# Altium PCB Base_Station_Unit_board.PcbDoc
Units mm, origin at the board's own origin, x right, y up, seen from the top; angles counter-clockwise.
Board outline 75 x 70 mm, 4 copper layers (Component Side Top, Ground Plane, Power Plane, Component Side Bottom), stack 0.844 mm thick; 109 components, 81 nets, 428 pads, 157 vias.
Unrouted connection lines stored in the file: 7.
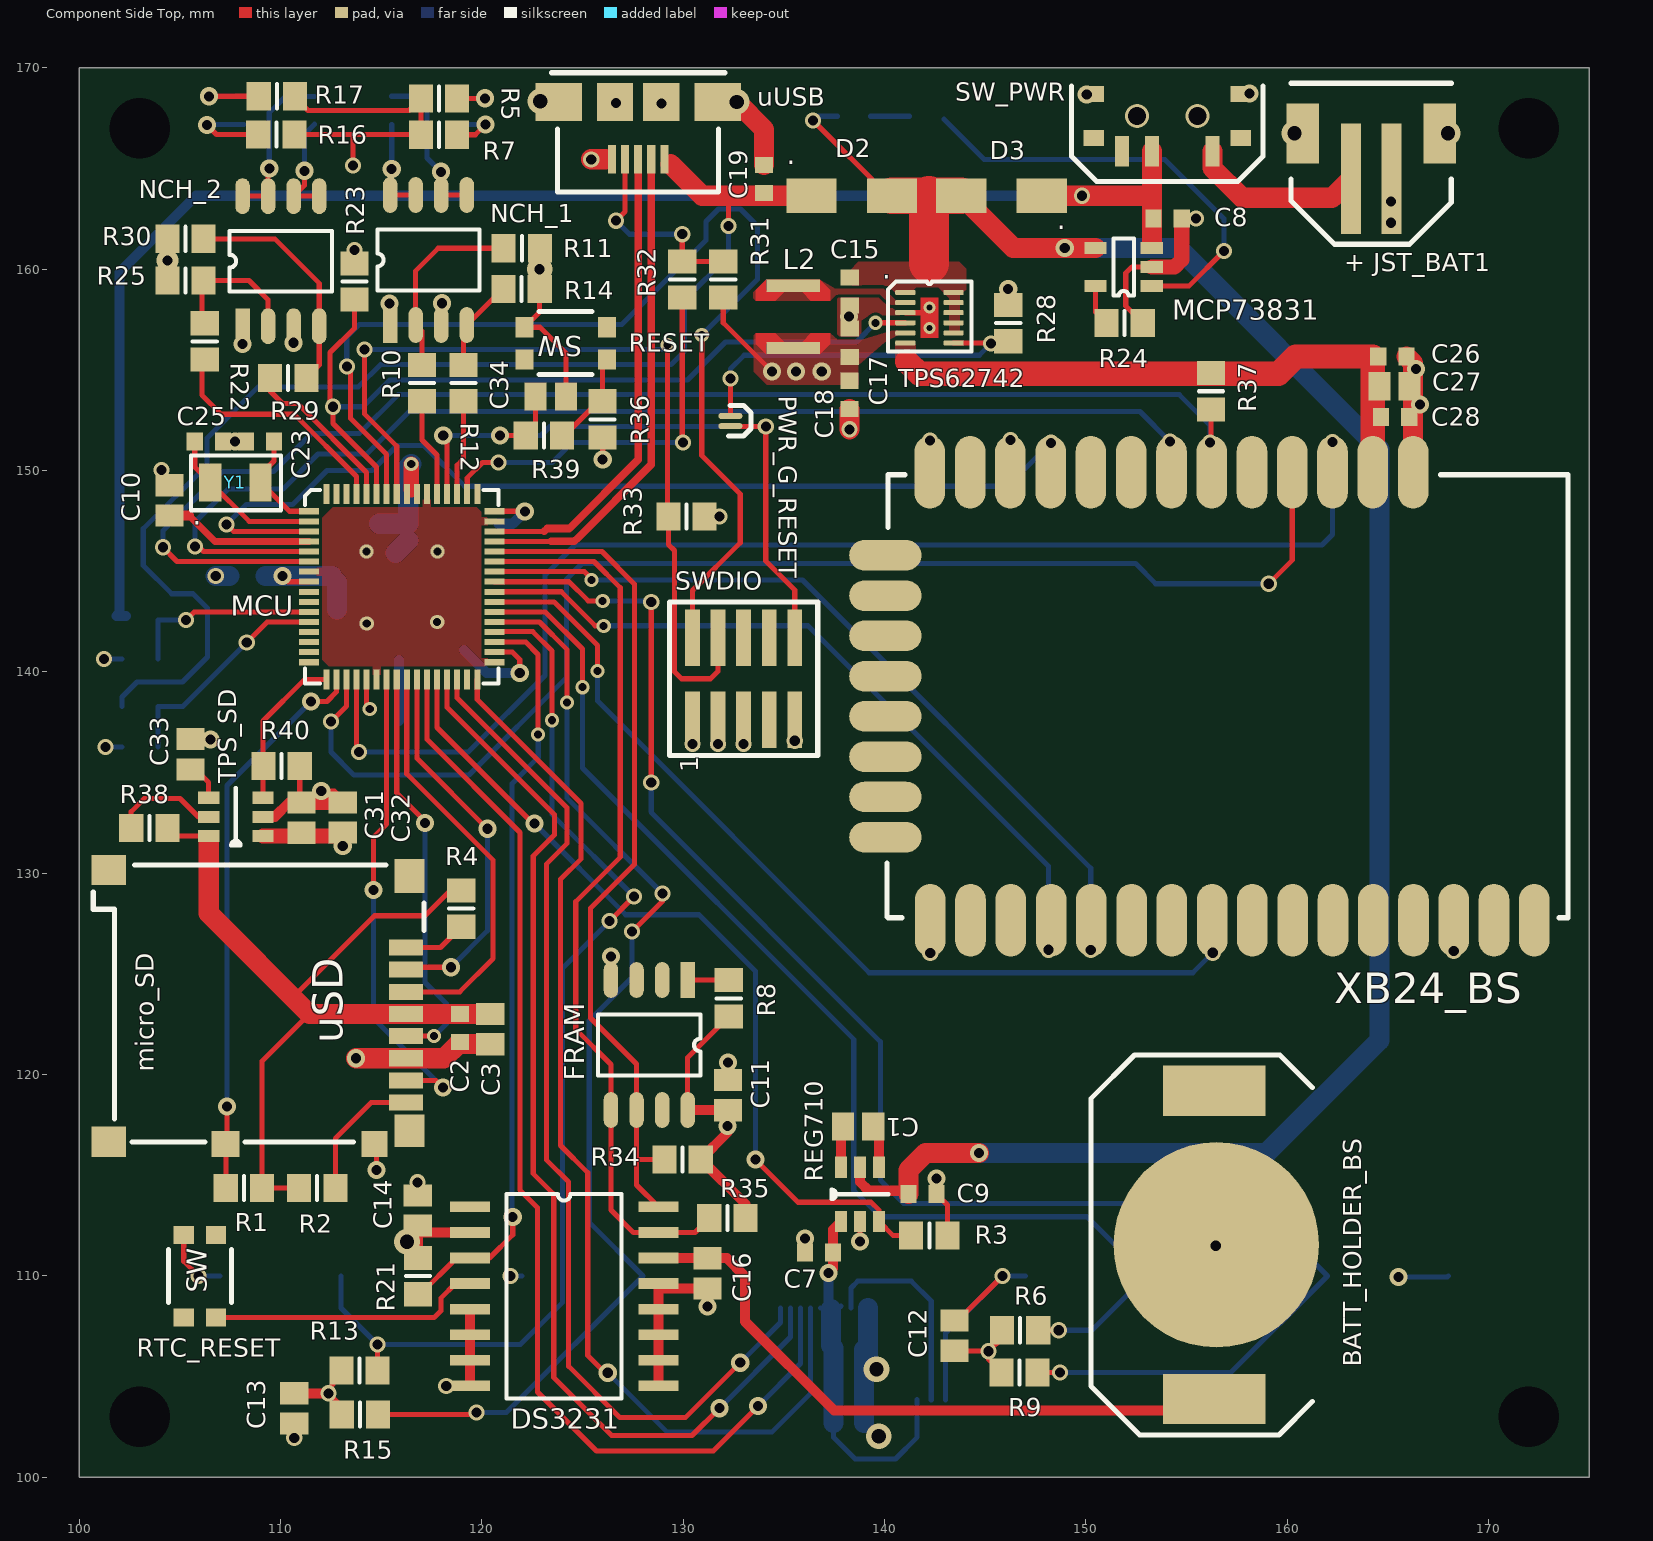
[diagram p0: Component Side Top view]
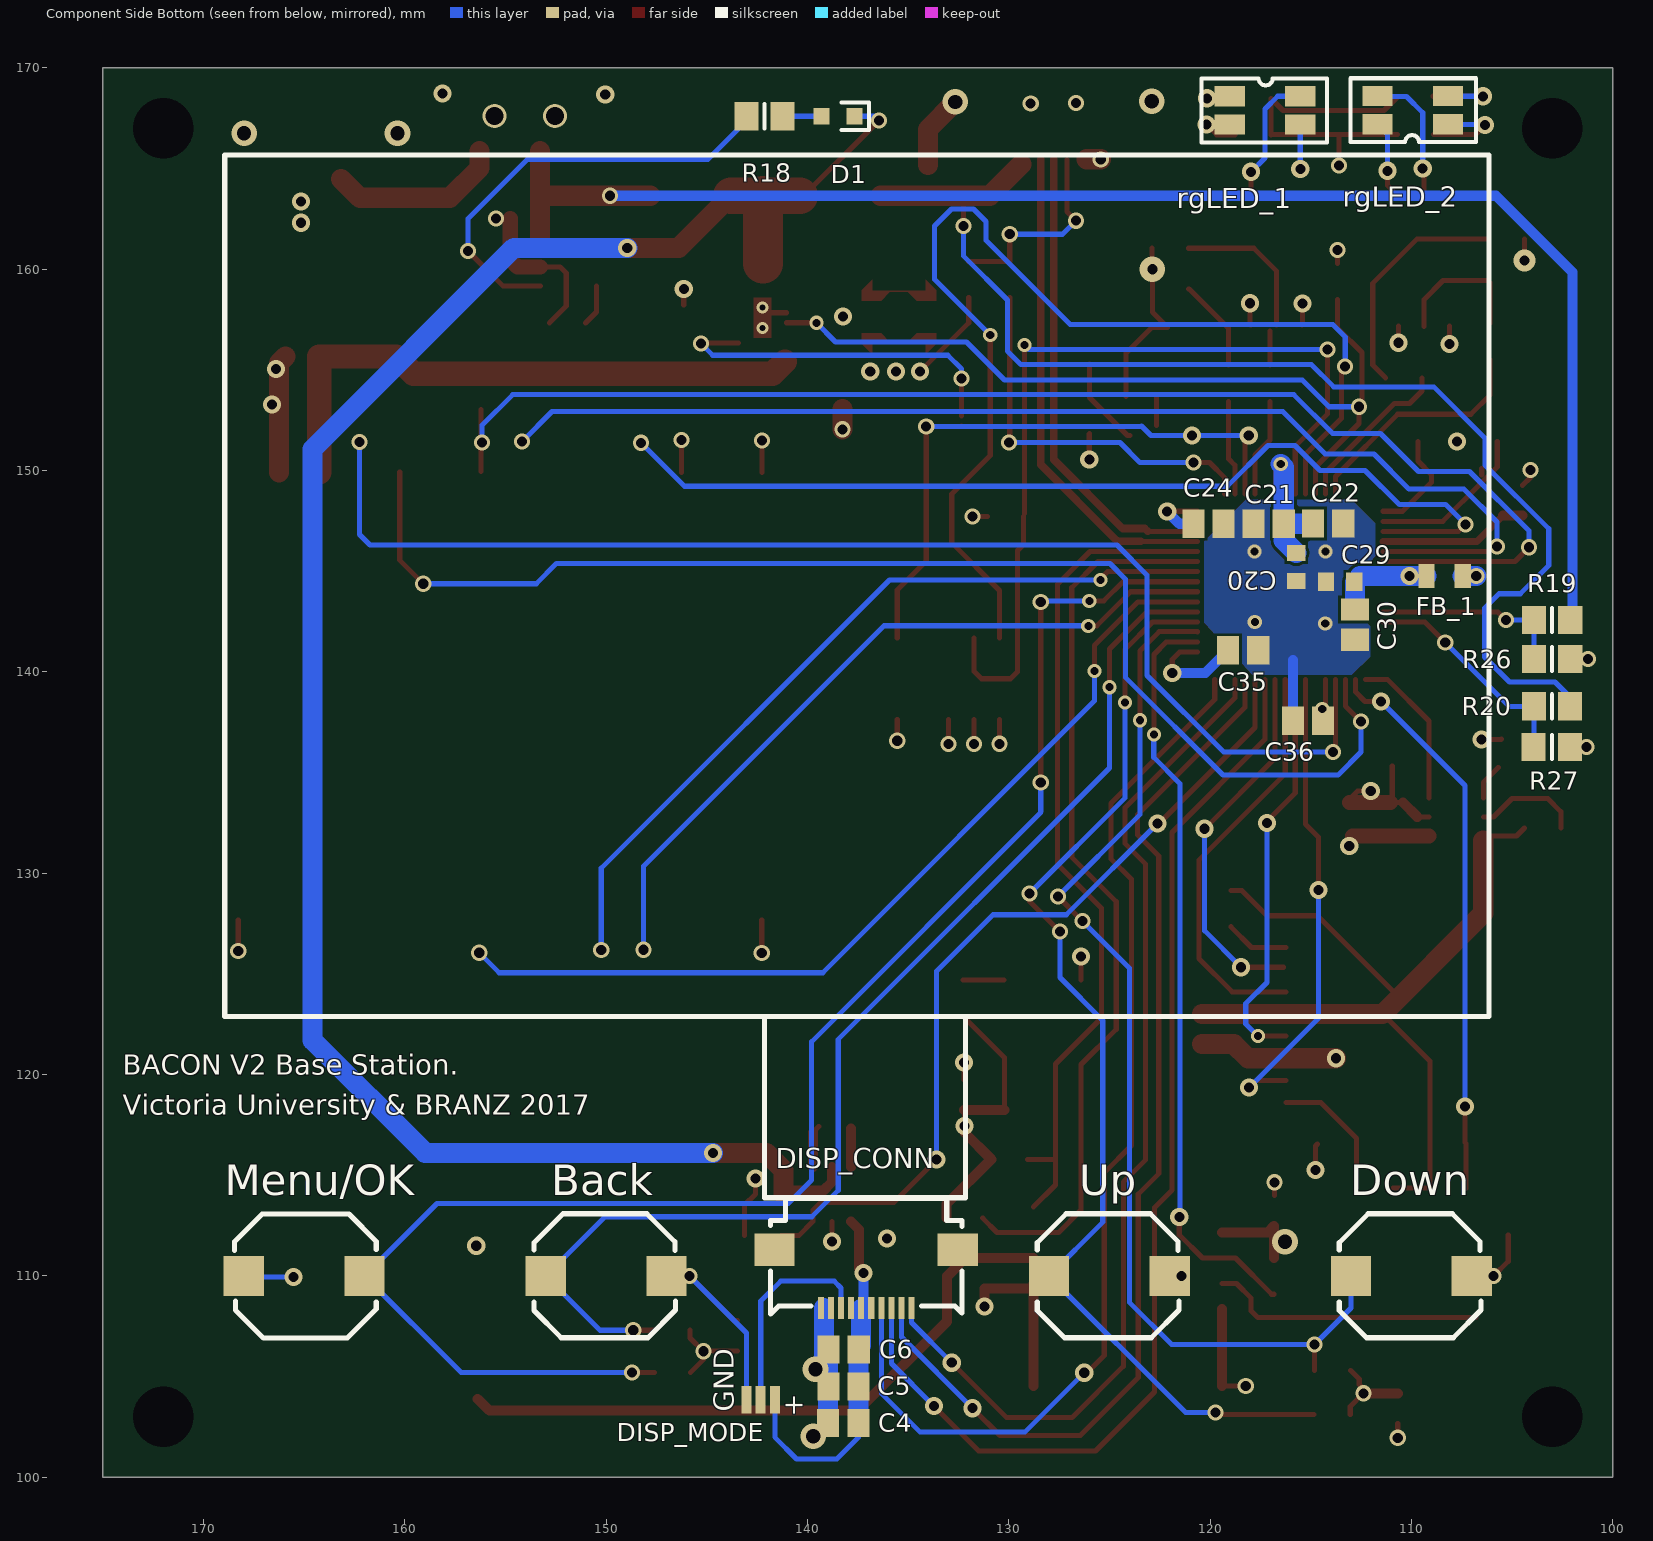
[diagram p1: Component Side Bottom view, seen from below]
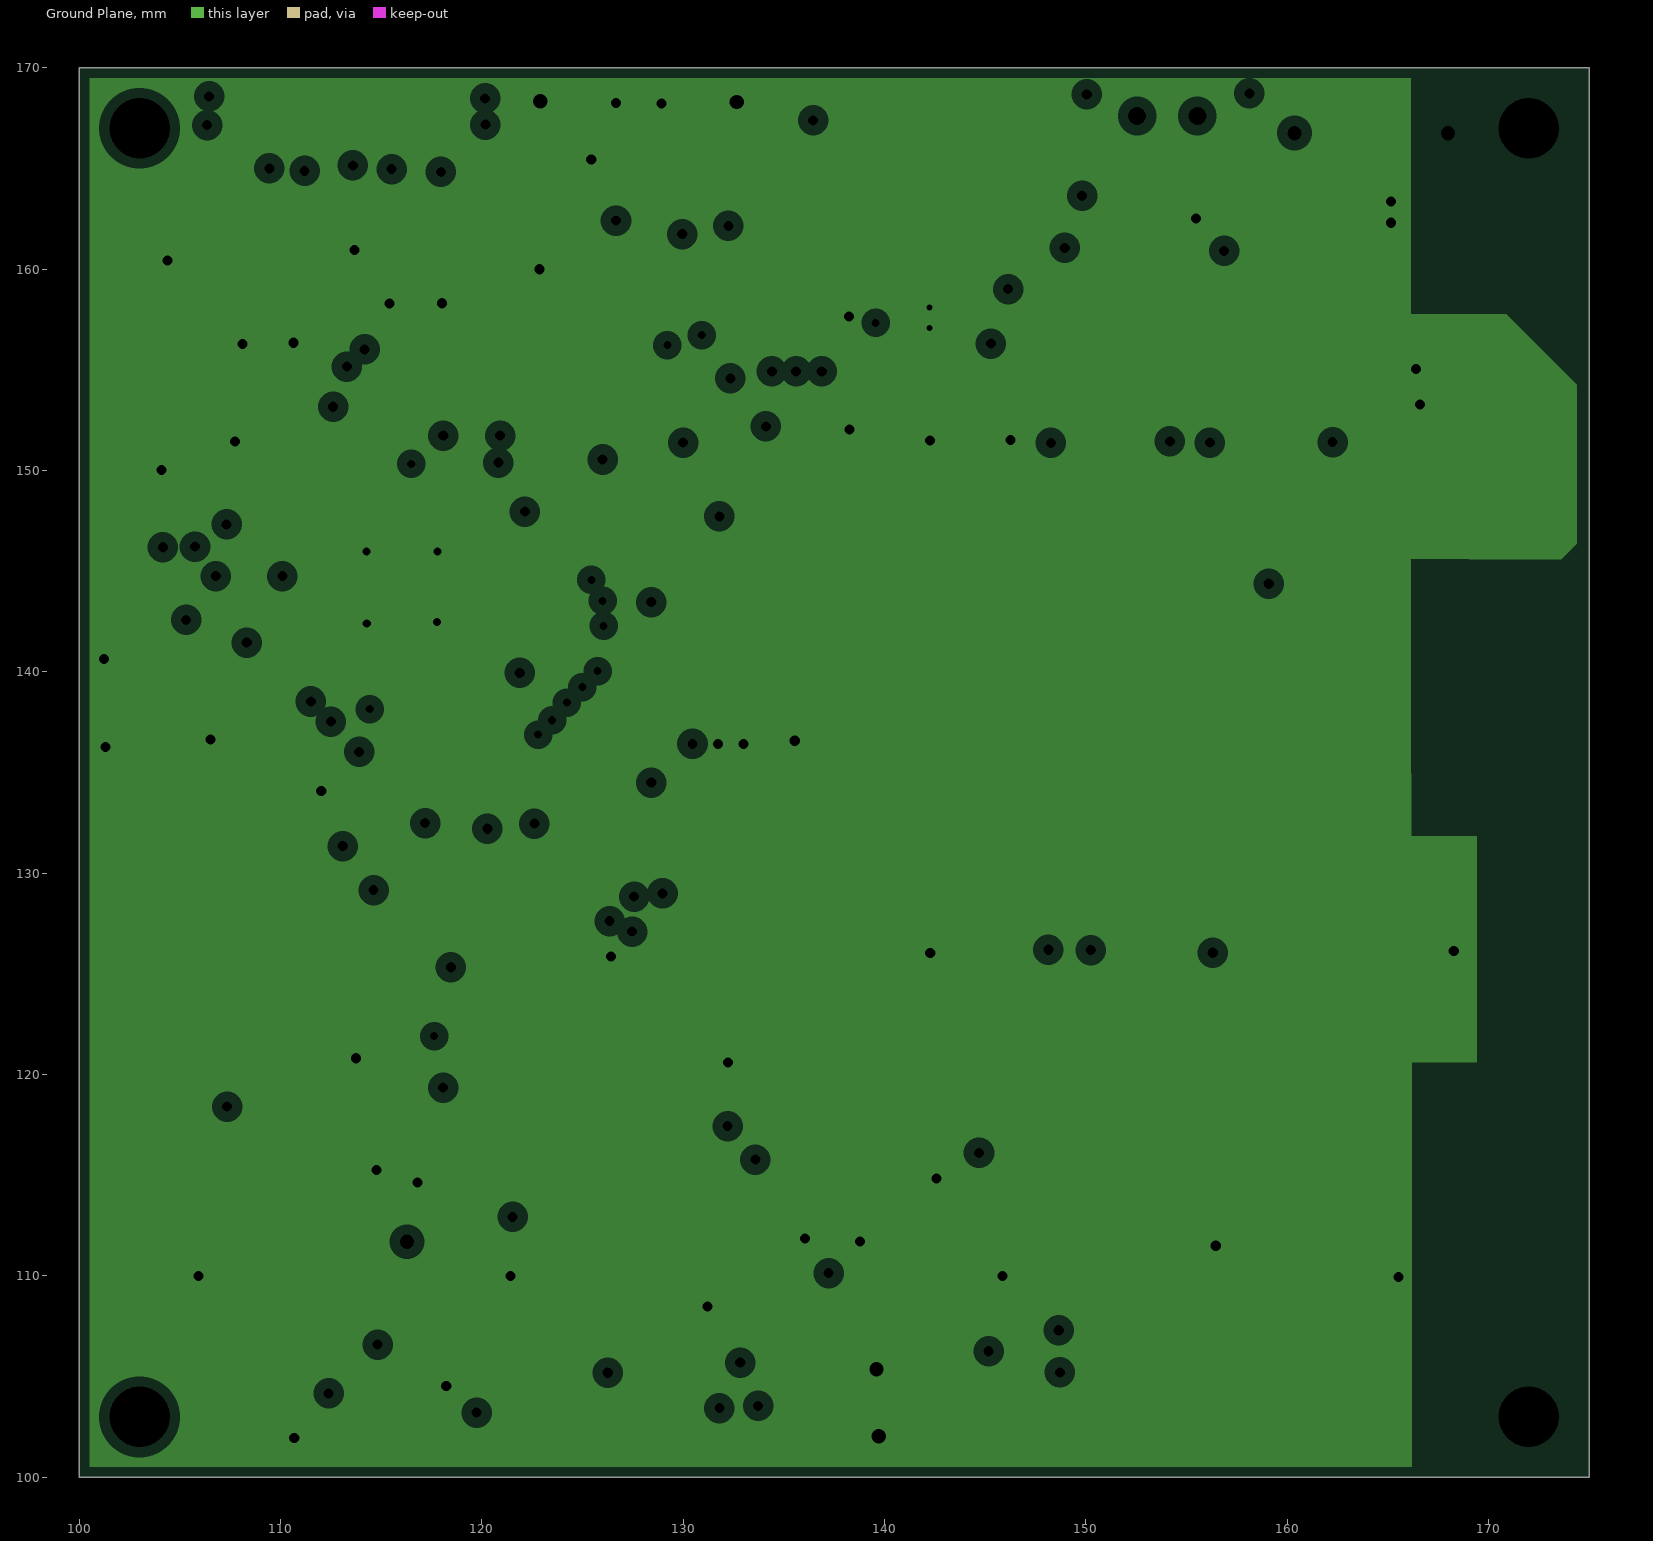
[diagram p2: Ground Plane, clearances drawn from the general rule]
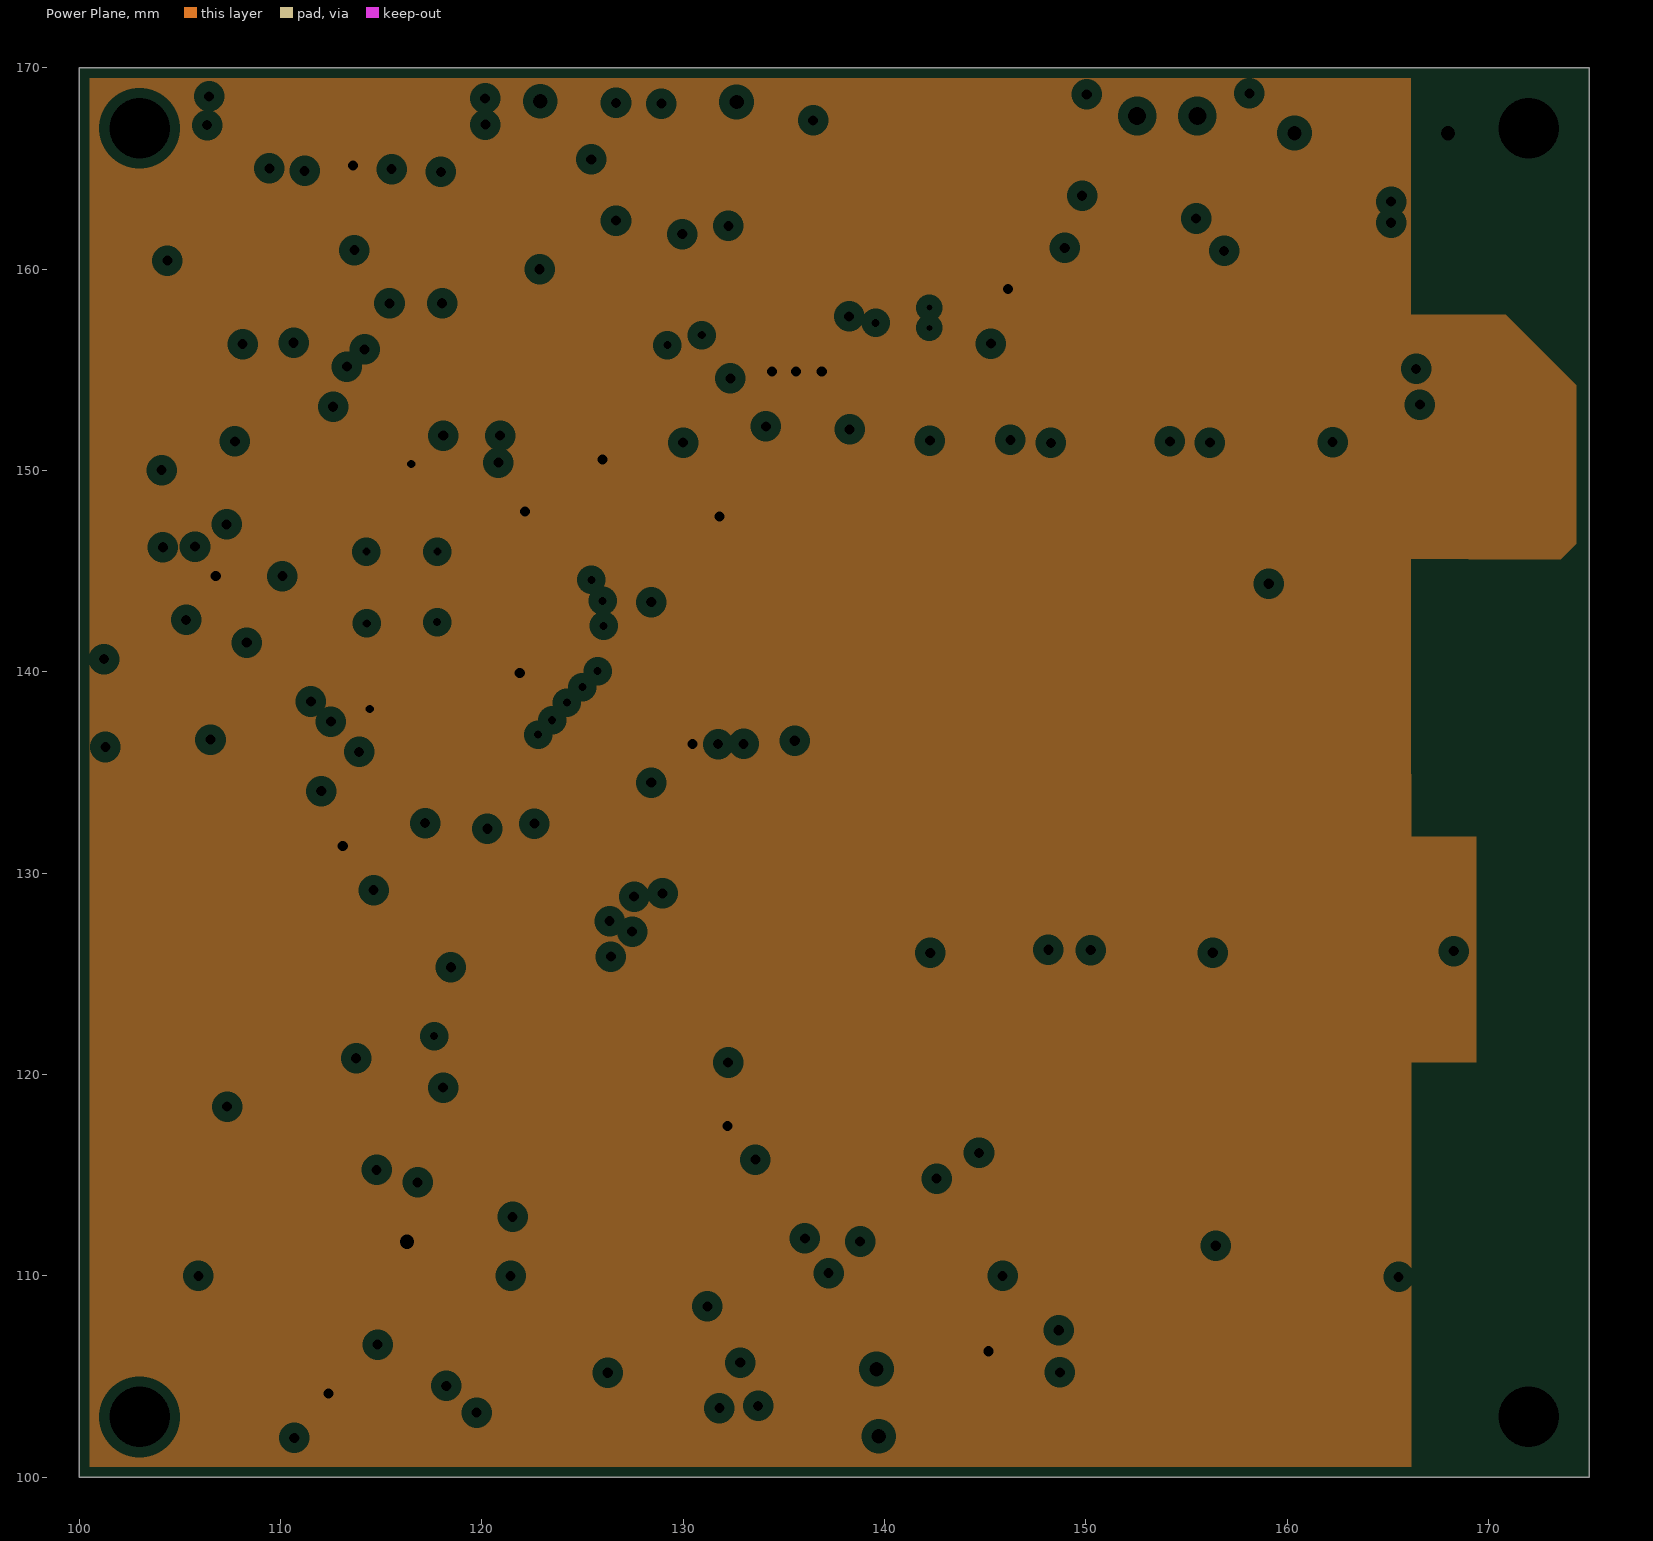
[diagram p3: Power Plane, clearances drawn from the general rule]

## Layer stack, top to bottom
Top Solder: solder mask 0.0102, Solder Resist, Dk 3.5
Component Side Top: signal copper 0.0356
Dielectric 1: core 0.32, FR-4, Dk 4.8
Ground Plane: plane copper 0.036, net GND
Dielectric 3: prepreg 0.127, Dk 4.2
Power Plane: plane copper 0.036, net +3V3
Dielectric 4: core 0.254, Dk 4.2
Component Side Bottom: signal copper 0.0356
Bottom Solder: solder mask 0.0102, Solder Resist, Dk 3.5

## Board outline
100,100 175,100 175,170 100,170

## Design rules (kind name [scope] priority, off if disabled: settings)
Clearance [All] p1: gap=0.152
DiffPairsRouting [All] p1: maxlimit=0.254 minlimit=0.254 mostfreqgap=0.254 toplayer_minwidth=0.381 toplayer_maxwidth=0.381 toplayer_prefwidth=0.381 bottomlayer_minwidth=0.381 bottomlayer_maxwidth=0.381 bottomlayer_prefwidth=0.381 maxuncoupledlength=12.7
HoleSize [All] p1: absolutevalues=TRUE maxlimit=6.3 minlimit=0.3 maxpercent=80.000 minpercent=20.000
PlaneClearance [All] p1: clearance=0.508
PlaneConnect [All] p1: planeconnectstyle=Direct reliefexpansion=0.508 reliefentries=4 reliefconductorwidth=0.254 reliefairgap=0.254
PolygonConnect [All] p1: connectstyle=Direct reliefconductorwidth=0.254 reliefentries=4 polygonreliefangle="90 Angle" airgapwidth=0.254
RoutingVias [All] p1: holewidth=0.5 width=0.8 viastyle="Through Hole" minholewidth=0.4 minwidth=0.7 maxholewidth=2 maxwidth=2.5
SolderMaskExpansion [All] p1: expansion=0.102
Width [All] p1: maxlimit=10 minlimit=0.152 preferedwidth=0.254
26 further rules are at their usual default settings.

## Classes and differential pairs
differential pair D: +D_P -D_N

## Components (designator, comment, footprint, x,y, rotation, side; value= is the part's Value field where it differs from the comment)
"+ JST_BAT1" "JST_CON" JST_CONN_SMT_Vertical 165.17,164.49 r0 top (schematic designator JST_BAT1)
Back "Button" "EVPASCB1A - Tactile Switch" 150,110 r180 bottom
BATT_HOLDER_BS "CR2032_BATTERY_HOLDER" CR1220_clip 156.48,111.54 r90 top
C1 "Cap Semi" C0805 138.69,117.42 r180 top
C2 "Cap Semi" 1608[0603] 118.92,122.31 r270 top
C3 "Cap Semi" C0805 120.41,122.26 r270 top
C4 "Cap Semi" C0805 138.22,102.7 r180 bottom
C5 "Cap Semi" C0805 138.21,104.51 r180 bottom
C6 "Cap Semi" C0805 138.2,106.35 r180 bottom
C7 "Cap Semi" 1608[0603] 136.74,111.17 r0 top
C8 "Cap Semi" 1608[0603] 154.06,162.52 r180 top
C9 "Cap Semi" 1608[0603] 141.88,114.06 r180 top
C10 "Cap Semi" C0805 104.48,148.52 r90 top
C11 "Cap Semi" C0805 132.23,118.98 r270 top
C12 "Cap Semi" C0805 143.47,107.03 r270 top
C13 "Cap Semi" C0805 110.68,103.42 r90 top
C14 "Cap Semi" C0805 116.81,113.25 r270 top
C15 "Cap Semi" 1608[0603] 138.27,158.89 r90 top
C16 "Cap Semi" C0805 131.2,110.13 r90 top
C17 "Cap Semi" 1608[0603] 138.27,156.35 r270 top
C18 "Cap Semi" 1608[0603] 138.26,153.76 r270 top
C19 "Cap Semi" 1608[0603] 134.02,164.48 r90 top
C20 "Cap Semi" 1608[0603] 115.72,145.21 r90 bottom
C21 "Cap Semi" C0805 117.09,147.36 r180 bottom
C22 "Cap Semi" C0805 114.14,147.37 r0 bottom
C23 "Cap Semi" 1608[0603] 108.97,151.44 r180 top
C24 "Cap Semi" C0805 120.08,147.36 r0 bottom
C25 "Cap Semi" 1608[0603] 106.44,151.45 r0 top
C26 "Cap Semi" 1608[0603] 165.22,155.67 r180 top
C27 "Cap Semi" C0805 165.33,154.19 r0 top
C28 "Cap Semi" 1608[0603] 165.36,152.66 r0 top
C29 "Cap Semi" 1608[0603] 113.54,144.48 r0 bottom
C30 "Cap Semi" C0805 112.81,142.35 r270 bottom
C31 "Cap Semi" C0805 111.04,132.76 r90 top
C32 "Cap Semi" C0805 113.09,132.77 r90 top
C33 "Cap Semi" C0805 105.53,135.91 r90 top
C34 "Cap Semi" C0805 123.42,153.68 r180 top
C35 "Cap Semi" C0805 118.36,141.08 r0 bottom
C36 "Cap Semi" C0805 115.14,137.57 r180 bottom
D1 "LED2" LED_Single_Orange 137.66,167.6 r0 bottom
D2 "Diode" DO-214AC 136.37,163.65 r0 top
D3 "Diode" DO-214AC 147.8,163.65 r180 top
DISP_CONN "CONN_FPC" CONN_FPC 134.83,108.5 r0 bottom (schematic designator DISP_CONN1)
DISP_MODE "DISP_JUMPER" DISP_Jumper 143.02,103.85 r90 bottom (schematic designator DISP_MODE1)
Down "Button" "EVPASCB1A - Tactile Switch" 110,110 r180 bottom
DS3231 "DS3231" "16 SO" 119.4,113.43 r0 top
FB_1 "Ferrite Beadt" FERRITE_BEAD 107.45,144.76 r0 bottom
FRAM "FRAM 8-SOP" SOP-8 130.22,124.7 r270 top (schematic designator FRAM1)
L2 "Inductor" 2.2uH_Inductor 135.46,159.18 r270 top
MCP73831 "MCP73831" SOT-23 153.27,159.16 r180 top
MCU "ATSAMD21J18A-AF" QFN64_rect_medPin 111.52,147.98 r0 top
Menu/OK "Button" "EVPASCB1A - Tactile Switch" 165,110 r0 bottom
micro_SD "*" MicroSD_Connector 100.62,117.41 r90 top
NCH_1 "DUAL_MOSFET_IRF8915TRPBF" SOP-8 115.44,157.23 r90 top (schematic designator DUAL_NCH_1)
NCH_2 "DUAL_MOSFET_IRF8915TRPBF" SOP-8 108.11,157.17 r90 top (schematic designator DUAL_NCH_2)
PWR_G_RESET "Header 2" SMD_Jumper 132.34,152.71 r180 top (schematic designator PWR_GOOD_MCU_RESET)
R1 "Res3" 6-0805_N 108.18,114.36 r180 top
R2 "Res3" 6-0805_N 111.82,114.36 r0 top
R3 "Res3" 6-0805_N 142.22,112 r0 top
R4 "Res3" 6-0805_N 118.97,128.24 r270 top
R5 "Res3" 6-0805_N 117.87,168.48 r180 top
R6 "Res3" 6-0805_N 146.73,107.3 r180 top
R7 "Res3" 6-0805_N 117.87,166.68 r180 top
R8 "Res3" 6-0805_N 132.26,123.79 r270 top
R9 "Res3" 6-0805_N 146.7,105.21 r180 top
R10 "Res3" 6-0805_N 117.02,154.34 r270 top
R11 "Res3" 6-0805_N 121.98,161.04 r180 top
R12 "Res3" 6-0805_N 119.09,154.34 r270 top
R13 "Res3" 6-0805_N 113.92,105.31 r0 top
R14 "Res3" 6-0805_N 121.97,159.02 r180 top
R15 "Res3" 6-0805_N 113.94,103.12 r0 top
R16 "Res3" 6-0805_N 109.79,166.69 r0 top
R17 "Res3" 6-0805_N 109.82,168.59 r0 top
R18 "Res3" 6-0805_N 142.13,167.6 r0 bottom
R19 "Res3" 6-0805_N 103.01,142.58 r180 bottom
R20 "Res3" 6-0805_N 103.02,138.29 r180 bottom
R21 "Res3" 6-0805_N 116.82,109.99 r90 top
R22 "Res3" 6-0805_N 106.23,156.42 r270 top
R23 "Res3" 6-0805_N 113.67,159.39 r270 top
R24 "Res3" 6-0805_N 151.92,157.33 r180 top
R25 "Res3" 6-0805_N 105.28,159.44 r180 top
R26 "Res3" 6-0805_N 103.01,140.64 r0 bottom
R27 "Res3" 6-0805_N 103.03,136.27 r0 bottom
R28 "Res3" 6-0805_N 146.14,157.32 r90 top
R29 "Res3" 6-0805_N 110.38,154.6 r180 top
R30 "Res3" 6-0805_N 105.28,161.51 r180 top
R31 "Res3" 6-0805_N 131.99,159.49 r270 top
R32 "Res3" 6-0805_N 129.95,159.49 r90 top
R33 "Res3" 6-0805_N 130.16,147.72 r0 top
R34 "Res3" 6-0805_N 129.97,115.79 r180 top
R35 "Res3" 6-0805_N 132.19,112.87 r180 top
R36 "Res3" 6-0805_N 125.99,152.54 r270 top
R37 "Res3" 6-0805_N 156.21,153.94 r270 top
R38 "Res3" 6-0805_N 103.48,132.25 r0 top
R39 "Res3" 6-0805_N 123.08,151.74 r0 top
R40 "Res3" 6-0805_N 110.05,135.33 r180 top
REG710 "REG710NA-5/3K" SOT-23-6 137.83,112.7 r90 top
RESET "SW-PB" SW_TACTILE 126.22,155.52 r180 top
rgLED_1 "LED_GREEN_RED_HSMF" LED4 119.02,168.59 r180 bottom (schematic designator rgLED_BS_1)
rgLED_2 "LED_GREEN_RED_HSMF" LED4 108.19,167.2 r0 bottom (schematic designator rgLED_BS_2)
RTC_RESET "SW-PB" SW_TACTILE 105.19,107.93 r90 top
SW_PWR "Slide_switch" Slide_SW 154.04,167.61 r180 top
SWDIO "FTSH-105-01-XXX-DV-K" FTSH-105-01-XXX-DV-K 133,139.66 r0 top
TPS62742 "TPS62742" "WSON12 - small" 140.53,158.84 r0 top
TPS_SD "TPS22918-Q1" SOT-23-6 109.13,131.85 r180 top (schematic designator TPS22919_SD)
Up "Button" "EVPASCB1A - Tactile Switch" 125,110 r180 bottom
uUSB "micro_USB" MicroUSB_CONN 127.76,165.46 r180 top
XB24_BS "XB24CDMUIS-001" XB24_RADIO 166.25,149.79 r270 top locked
Y1 "XTAL" ABS07_Crystal 106.51,149.41 r0 top

## Footprints (in the part's own frame and the unit in brackets; to place one, negate y for a bottom-side part, rotate by r counter-clockwise, add the part's x,y. Pads: shape width x height; smd on the part's side, far side on the other; paste and mask are expansions set on the pad)
2.2uH_Inductor [mm] "LPS3314-222MRB"
  rect 0.6x2.65 smd: 1(0,0) 2(3.1,0)
  Component Side Top region: -0.3,1.325 0.225,1.85 0.75,1.85 0.75,0.882 0.3,0.44 0.3,-0.44 0.75,-0.882 0.75,-1.85 0.225,-1.85 -0.3,-1.325 0.25,-1.325 0.25,1.325
  Component Side Top region: 3.4,-1.325 2.875,-1.85 2.35,-1.85 2.35,-0.882 2.8,-0.44 2.8,0.44 2.35,0.882 2.35,1.85 2.875,1.85 3.4,1.325 2.85,1.325 2.85,-1.325
  body extent -0.3,-1.85 3.4,1.85, height 1.4
6-0805_N [mm] "Chip Resistor, Body 2.0x1.2mm, IPC Medium Density"
  rect 1.2x1.4 smd: 1(-0.9,0) 2(0.9,0)
  silkscreen extent 0,-0.6 0,0.6, body extent -1.07,-0.7 1.07,0.7, height 0.7
"16 SO" [mm]
  rect 1.98x0.53 smd: 1(0,0) 2(0,-1.27) 3(0,-2.54) 4(0,-3.81) 5(0,-5.08) 6(0,-6.35) 7(0,-7.62) 8(0,-8.89) 9(9.37,-8.89) 10(9.37,-7.62) 11(9.37,-6.35) 12(9.37,-5.08) 13(9.37,-3.81) 14(9.37,-2.54) 15(9.37,-1.27) 16(9.37,0)
  silkscreen extent 1.83,-9.52 7.54,0.64, body extent 1.83,-9.52 7.54,0.64, height 3
1608[0603] [mm] "Chip Capacitor, Body 1.6x0.8mm, IPC High Density"
  rect 0.8x0.9 smd: 1(-0.7,0) 2(0.7,0)
  body extent -0.87,-0.48 0.87,0.48, height 1.3
ABS07_Crystal [mm] "ABS07-32.768KHZ-T"
  rect 1.1x1.9 smd: 1(0,0) 2(2.5,0)
  silkscreen extent -0.97,-1.38 3.51,1.33, body extent -0.64,-1.06 3.15,1.05, height 0.9
C0805 [mm] "Chip Capacitor, Body 2.0x1.3mm, IPC High Density"
  rect 1.1x1.4 smd: 1(-0.75,0) 2(0.75,0)
  body extent -1.1,-0.72 1.1,0.72, height 1.4
CONN_FPC [mm]
  rect 0.3x1.1 smd: 1(0,0.1) 2(0.5,0.1) 3(1,0.1) 4(1.5,0.1) 5(2,0.1) 6(2.5,0.1) 7(3,0.1) 8(3.5,0.1) 9(4,0.1) 10(4.5,0.1)
  rect 2x1.6 smd: 9(-2.3,-2.8) 9(6.8,-2.8)
  silkscreen extent -2.5,-5.35 7,0.4, body extent -2.5,-4.37 7,-0.12, height 2
CR1220_clip [mm]
  rect 2.5x5.1 smd: 1(-7.65,0.1) 1(7.65,0.1)
  round 10.2 smd: 2(0,0)
  silkscreen extent -9.44,-4.77 9.43,6.23
DISP_Jumper [mm]
  rect 1.35x0.5 smd: 1(0,0) 2(0,-0.7) 3(0,-1.4)
DO-214AC [mm] "DIODE B340A-13-F"
  rect 2.5x1.7 smd: 1(0,0) 2(4,0)
  body extent -0.68,-1.4 4.68,1.4, height 2.3
"EVPASCB1A - Tactile Switch" [mm]
  rect 2x2 smd: 1(-3,0) 2(3,0)
  silkscreen extent -3.59,-3.07 3.45,3.09, body extent -3.59,-3.07 3.45,3.09, height 5
FERRITE_BEAD [mm] "MMZ2012Y152B"
  rect 0.8x1.2 smd: 1(0,0) 2(1.8,0)
  body extent -0.02,-0.58 1.84,0.59, height 2
FTSH-105-01-XXX-DV-K [mil]
  rect 29x110 smd mask+2: 1(-100,-80) 2(-100,80) 3(-50,-80) 4(-50,80) 5(0,-80) 6(0,80) 7(50,-80) 8(50,80) 9(100,-80) 10(100,80)
  silkscreen extent -145,-150 145,150
JST_CONN_SMT_Vertical [mm] "B2B-PH-SM4-TB(LF)(SN) 2 Contacts Surface mount JST connector"
  rect 1x5.5 smd: 1(0,0) 2(-2,0)
  rect 1.6x3 smd: 3(-4.4,2.25) 3(2.4,2.25)
  silkscreen extent -4.97,-3.25 2.98,4.75, body extent -4.97,-0.25 2.98,4.75, height 6.6
LED4 [mm]
  rect 1.5x1 smd: 1(0,0) 2(3.5,0) 3(0,-1.4) 4(3.5,-1.4)
  silkscreen extent -1.4,-2.29 4.83,0.89, body extent -0.03,-1.88 3.62,0.5, height 2
LED_Single_Orange [mm] "KP-1608SECK"
  rect 0.8x0.8 smd: 1(0,0) 2(1.65,0)
  silkscreen extent -0.71,-0.67 0.65,0.7, body extent -0.07,-0.5 1.77,0.46, height 2
MicroSD_Connector [mm] "MOLEX 502774-0891"
  rect 0.8x1.68 smd: 1(8.9,-15.61) 2(7.8,-15.61) 3(6.7,-15.61) 4(5.6,-15.61) 5(4.5,-15.61) 6(3.4,-15.61) 7(2.3,-15.61) 8(1.2,-15.61)
  rect 1.29x1.3 smd: 9(-0.855,-14.05)
  rect 1.29x1.4 smd: 10(-0.855,-6.65)
  rect 1.5x1.7 smd: 12(-0.75,-0.85) 12(12.75,-0.85)
  rect 1.6x1.5 smd: 12(-0.2,-15.79)
  rect 1.7x1.5 smd: 12(12.45,-15.79)
  silkscreen extent -0.75,-16.5 13,-0.07, body extent -1.12,-16.17 13.15,-0.05, height 1.8
MicroUSB_CONN [mm]
  rect 0.4x1.4 smd: 1(-1.3,0) 2(-0.65,0) 3(0,0) 4(0.65,0) 5(1.3,0)
  rect 2.3x1.9 smd: 5(-3.95,-2.85) 5(3.95,-2.85)
  rect 1.8x1.9 smd: 5(-1.15,-2.85) 5(1.15,-2.85)
  silkscreen extent -4.3,-4.3 4.3,1.63
QFN64_rect_medPin [mm]
  rect 1x0.3 smd: 1(-0.1,0) 2(-0.1,-0.5) 3(-0.1,-1) 4(-0.1,-1.5) 5(-0.1,-2) 6(-0.1,-2.5) 7(-0.1,-3) 8(-0.1,-3.5) 9(-0.1,-4) 10(-0.1,-4.5) 11(-0.1,-5) 12(-0.1,-5.5) 13(-0.1,-6) 14(-0.1,-6.5) 15(-0.1,-7) 16(-0.1,-7.5) 33(9.1,-7.5) 34(9.1,-7) 35(9.1,-6.5) 36(9.1,-6) 37(9.1,-5.5) 38(9.1,-5) 39(9.1,-4.5) 40(9.1,-4) 41(9.1,-3.5) 42(9.1,-3) 43(9.1,-2.5) 44(9.1,-2) 45(9.1,-1.5) 46(9.1,-1) 47(9.1,-0.5) 48(9.1,0)
  rect 0.3x1 smd: 17(0.75,-8.35) 18(1.25,-8.35) 19(1.75,-8.35) 20(2.25,-8.35) 21(2.75,-8.35) 22(3.25,-8.35) 23(3.75,-8.35) 24(4.25,-8.35) 25(4.75,-8.35) 26(5.25,-8.35) 27(5.75,-8.35) 28(6.25,-8.35) 29(6.75,-8.35) 30(7.25,-8.35) 31(7.75,-8.35) 32(8.25,-8.35) 49(8.25,0.85) 50(7.75,0.85) 51(7.25,0.85) 52(6.75,0.85) 53(6.25,0.85) 54(5.75,0.85) 55(5.25,0.85) 56(4.75,0.85) 57(4.25,0.85) 58(3.75,0.85) 59(3.25,0.85) 60(2.75,0.85) 61(2.25,0.85) 62(1.75,0.85) 63(1.25,0.85) 64(0.75,0.85)
  silkscreen extent -0.3,-8.55 9.3,1.05, body extent -0.35,-8.58 9.35,1.06, height 2
Slide_SW [mm] "PCM12SMTR"
  rect 0.7x1.5 smd: 1(-2.25,1.75) 2(0.75,1.75) 3(2.25,1.75)
  rect 1x0.8 smd: 4(-3.65,-1.1) 4(-3.65,1.1) 4(3.65,-1.1) 4(3.65,1.1)
  round 1.2 hole 0.9: 5(-1.5,0) 5(1.5,0)
  silkscreen extent -4.75,-1.5 4.75,3.25, body extent -3.14,-1.65 3.11,1.58, height 3
SMD_Jumper [mm] "Connector; Header; 2 Position"
  oval 1.2x0.3 smd: 1(0,0) 2(0,0.5)
  silkscreen extent -1.02,-0.52 0.1,0.99
SOP-8 [mm]
  rect 1.78x0.72 smd: 1(0,0)
  oval 1.78x0.72 smd: 2(0,-1.27) 3(0,-2.54) 4(0,-3.81) 5(6.46,-3.81) 6(6.46,-2.54) 7(6.46,-1.27) 8(6.46,0)
  silkscreen extent 1.72,-4.44 4.74,0.64, body extent 1.72,-4.44 4.74,0.64, height 2
SOT-23 [mm]
  rect 1.1x0.6 smd: 1(0,0) 2(0,-0.95) 3(0,-1.9) 4(2.8,-1.9) 5(2.8,0)
  silkscreen extent 0.89,-2.38 1.91,0.48, body extent 0.72,-2.19 2.08,0.24, height 2
SOT-23-6 [mm]
  rect 1.05x0.6 smd: 1(0,0) 2(0,-0.95) 3(0,-1.9) 4(2.7,-1.9) 5(2.7,-0.95) 6(2.7,0)
  silkscreen extent 1.11,-2.38 1.59,0.48, body extent 0.65,-2.19 2.01,0.24, height 2
SW_TACTILE [mm] "KMR231G LFS"
  rect 0.9x1 smd: 1(0,0) 1(4.1,0) 2(0,-1.6) 2(4.1,-1.6)
  silkscreen extent 0.75,-2.37 3.37,0.75, body extent 0.27,-2.13 3.77,0.55, height 2
"WSON12 - small" [mm]
  rrect40% 1x0.25 smd mask+0.07: 1(0.5,0) 2(0.5,-0.5) 3(0.5,-1) 4(0.5,-1.5) 5(0.5,-2) 6(0.5,-2.5) 7(2.9,-2.5) 8(2.9,-2) 9(2.9,-1.5) 10(2.9,-1) 11(2.9,-0.5) 12(2.9,0)
  Component Side Top region: 1.25,-2.25 2.15,-2.25 2.15,-0.25 1.25,-0.25
  silkscreen extent -0.36,-2.93 3.79,0.55, body extent 0.47,-2.74 3.02,0.24, height 2
XB24_RADIO [mm] "XB24CDMUIS-001"
  oval 3.6x1.52 smd: 1(-0.125,0) 2(-0.125,-2) 3(-0.125,-4) 4(-0.125,-6) 5(-0.125,-8) 6(-0.125,-10) 7(-0.125,-12) 8(-0.125,-14) 9(-0.125,-16) 10(-0.125,-18) 11(-0.125,-20) 12(-0.125,-22) 13(-0.125,-24) 22(22.125,-23.98) 23(22.125,-21.98) 24(22.125,-19.98) 25(22.125,-17.98) 26(22.125,-15.98) 27(22.125,-13.98) 28(22.125,-11.98) 29(22.125,-9.98) 30(22.125,-7.98) 31(22.125,-5.98) 32(22.125,-3.98) 33(22.125,-1.98) 34(22.125,0.02) 35(22.125,2.02) 36(22.125,4.02) 37(22.125,6.02)
  oval 1.52x3.6 smd: 14(4,-26.21) 15(6,-26.21) 16(8,-26.21) 17(10,-26.21) 18(12,-26.21) 19(14,-26.21) 20(16,-26.21) 21(18,-26.21)
  silkscreen extent 0,-26.12 22,7.7, body extent 0,-26.07 22,7.7, height 4

## Part data
C1 C2 C3 C4 C5 C6 C7 C8 C9 C10 C11 C12 C13 C14 C15 C16 C17 C18 C19 C20 C21 C22 C23 C24 C25 C26 C27 C28 C29 C30 C31 C32 C33 C34 C35 C36: "Capacitor (Semiconductor SIM Model)"
D1: "Typical RED, GREEN, YELLOW, AMBER GaAs LED"
D2 D3: "Default Diode"
FB_1: library part Inductor, "Inductor"
micro_SD: library part micro_SD
PWR_G_RESET: "Header, 2-Pin"
R1 R2 R3 R4 R5 R6 R7 R8 R9 R10 R11 R12 R13 R14 R15 R16 R17 R18 R19 R20 R21 R22 R23 R24 R25 R26 R27 R28 R29 R30 R31 R32 R33 R34 R35 R36 R37 R38 R39 R40: "Resistor"
RESET RTC_RESET: "Switch"
SWDIO: "TERMINAL STRIP, .050\"(1.27mm) PITCH, 10 PINS, KEYED"
Y1: "Crystal Oscillator"

## Free pads (board coordinates)
  round 0 hole 3: 2(103,103) 2(103,167) 2(172,103) 2(172,167)

## Via types
v1: diameter 0.8, hole 0.5, Component Side Top to Component Side Bottom, 65 vias
v2: diameter 0.9, hole 0.5, Component Side Top to Component Side Bottom, 52 vias
v3: diameter 0.7, hole 0.4, Component Side Top to Component Side Bottom, 18 vias
v4: diameter 1.27, hole 0.711, Component Side Top to Component Side Bottom, 7 vias
v5: diameter 0.9, hole 0.5, Component Side Top to Component Side Bottom, tented top, 5 vias
v6: diameter 0.9, hole 0.5, Component Side Top to Component Side Bottom, tented bottom, 4 vias
v7: diameter 0.8, hole 0.5, Component Side Top to Component Side Bottom, tented top, 2 vias
v8: diameter 0.6, hole 0.3, Component Side Top to Component Side Bottom, tented both sides, 2 vias
v9: diameter 1.27, hole 0.5, Component Side Top to Component Side Bottom, 1 vias
v10: diameter 1.1, hole 0.5, Component Side Top to Component Side Bottom, 1 vias

## Nets (pads, with @x,y where several pads share a name; then routed paths per layer and width w, separated by ;. In a path a pad name is that pad's centre, name@x,y a point inside that pad or via, vN(x,y) a via of type N, cw(c..) or ccw(c..) an arc to the next point about the centre after c; other vN are vias at no path point)
+3V3: C11.2 C12.2 C13.2 C14.2 C17.2 C18.1 C20.2 C21.2 C22.2 C24.2 C31.1 C32.1 C35.2 C36.2 DS3231.2 FB_1.1 FRAM.8 L2.2 MCU.21 MCU.34 MCU.48 MCU.55 MCU.56 R5.2 R6.2 R7.2 R8.2 R9.2 R13.1 R15.1 R16.2 R17.2 R21.2 R28.2 R31.2 R33.2 R34.1 R35.1 R36.2 SWDIO.1 TPS62742.5 TPS_SD.1 | length 74.2
  Component Side Top w0.254: R16.2 113.59,166.69 ; R17.2@110.69,168.56 111.36,167.89 116.38,167.89 R5.2 R7.2 ; R13.1 112.59,104.88 112.59,104.62 112.39,104.42 v1(112.39,104.17) 113.04,103.52 R15.1 ; v2(113.09,131.35) C32.1 ; v1(113.59,165.16) 113.59,166.69 ; MCU.21 114.27,138.31 v3(114.43,138.15) ; R7.2@116.96,166.69 113.59,166.69 ; MCU.34 121.52,140.98 121.88,140.62 v2(121.88,139.95) ; MCU.48 122.11,147.98 v2(122.13,147.96) ; R36.2@125.99,151.83 126,151.82 v2(126,150.55) ; FRAM.8 130.22,120.85 R8.2 ; v1(130.46,136.43) SWDIO.1 ; R33.2 v1(131.8,147.72) ; R31.2 131.99,157.34 v2(134.4,154.93) ; v2(132.2,117.44) 132.2,118.22 C11.2@132.22,118.24 ; C12.2 v1@145.15,106.28 ; 145.17,105.84 R9.2 ; v1(145.17,106.26) 145.83,106.92 R6.2 ; R28.2 v2(146.14,159.01)
  Component Side Top w0.5: C13.2 v1(112.39,104.17) ; R21.2 116.82,112.49 117.15,112.16 DS3231.2 ; FRAM.8 C11.2@132.22,118.24 ; v2@132.2,117.12 R34.1 133.09,113.57 R35.1
  Component Side Top w0.75: TPS_SD.1 C32.1@112.92,131.85 ; 116.49,149.05 v3(116.49,150.33)
  Component Side Bottom w0.254: 116.34,146.53 C21.2
  Component Side Bottom w0.5: C35.2 120.24,139.95 v2(121.88,139.95) ; C24.2 121.53,147.36 v2(122.13,147.96)
  Component Side Bottom w1: v1(106.78,144.76) FB_1.1 ; C22.2@114.9,147.36 C21.2 116.34,150.18 v3(116.49,150.33) ; C20.2 116.34,146.53
  other v2: 135.61,154.93 136.88,154.93
  other v4: 116.28,111.7
+3V3_RADIO: C26.2 C27.1 C28.1 R37.1 TPS62742.6 XB24_BS.2 | length 29.5
  Component Side Top w1.2: 141.12,155.42 141.73,154.81 159.56,154.81 160.42,155.67 164.25,155.67 XB24_BS.2
AREF: C10.1 MCU.4 | length 7.5
  Component Side Top w0.35: 105.46,147.77 106.75,146.48 MCU.4
  Component Side Top w0.5: C10.1 105.46,147.77
BUTT_BACK: Back.1 MCU.38 R6.1 | length 60.4
  Component Side Top w0.254: MCU.38 123.15,142.98 124.99,141.14 v3(124.99,139.24) ; R6.1 v1(148.65,107.3)
  Component Side Bottom w0.254: v3(124.99,139.24) 124.99,135.23 138.47,121.75 138.47,114.25 139.78,112.94 150.06,112.94 Back.1 150.3,107.3 v1(148.65,107.3)
BUTT_DOWN: Down.1 MCU.36 R13.2 | length 54.3
  Component Side Top w0.254: R13.2 v1(114.82,106.59) ; MCU.36 120.62,141.999 122.531,141.999 123.49,141.04 v3(123.49,137.6) ; v1(126.34,127.62) v1(127.56,128.84)
  Component Side Bottom w0.254: Down.1 113,108.41 v1(114.82,106.59) 121.91,106.59 124.01,108.69 124.01,125.29 v1(126.34,127.62) ; v3(123.49,137.6) 123.49,132.91 v1(127.56,128.84)
BUTT_MENU: MCU.41 Menu/OK.1 R9.1 | length 82.4
  Component Side Top w0.254: MCU.41 124.33,144.48 125.28,143.53 v3(126,143.53) ; v1(128.41,134.5) v1(128.41,143.47) ; R9.1 v1(148.71,105.21)
  Component Side Bottom w0.254: v3@126,143.579 v3(126,143.53) 128.51,143.53 v1(128.41,143.47) ; v1(128.41,134.5) 128.41,133.07 128.42,133.06 128.42,133 139.79,121.63 139.79,114.76 140.95,113.6 158.4,113.6 Menu/OK.1 157.21,105.21 v1(148.71,105.21)
BUTT_UP: MCU.37 R15.2 Up.1 | length 55.9
  Component Side Top w0.254: R15.2 119.65,103.12 v1(119.74,103.21) ; MCU.37 122.86,142.48 124.22,141.12 v3(124.22,138.48) ; v1(127.46,127.1) 128.97,128.61 v1(128.97,129)
  Component Side Bottom w0.254: v1(119.74,103.21) 121.21,103.21 Up.1 125.33,112.67 125.33,122.69 127.46,124.82 v1(127.46,127.1) ; v3(124.22,138.48) 124.22,133.75 v1(128.97,129)
CTS: MCU.40 XB24_BS.25 | length 37.3
  Component Side Top w0.254: MCU.40 123.94,143.98 125.63,142.29 v3(126.05,142.29)
  Component Side Bottom w0.254: v3(126.05,142.29) 136.2,142.29 148.14,130.35 v1(148.14,126.2)
D_N: MCU.45 uUSB.2 | length 24.5
  Component Side Top w0.254: MCU.45 123.44,146.48
  Component Side Top w0.381: 123.445,146.485 124.593,146.485 124.779,146.671 128.41,150.302 uUSB.2
D_P: MCU.46 uUSB.3 | length 23.5
  Component Side Top w0.254: MCU.46 122.71,146.98 123.1,146.98
  Component Side Top w0.381: 123.1,146.98 123.24,147.12 124.33,147.12 127.76,150.55 uUSB.3
DISP_EN: MCU.28 R3.1 REG710.3 | length 42.3
  Component Side Top w0.254: MCU.28 117.77,137.24 122.61,132.4 v2(122.61,132.47) ; v2(133.58,115.78) 135.7,113.66 139.33,113.66 139.73,113.26 REG710.3 140.43,112 R3.1
  Component Side Bottom w0.254: v2(122.61,132.47) 127.14,127.94 130.78,127.94 133.58,125.14 v2(133.58,115.78)
DISP_MOSI: DISP_CONN.2 MCU.29 | length 54.2
  Component Side Top w0.254: MCU.29 118.27,138.24 123.6,132.91 123.6,131.91 122.55,130.86 122.55,115.08 123.57,114.06 123.57,104.95 126.45,102.07 130.44,102.07 v2(131.8,103.43)
  Component Side Bottom w0.254: v2(131.8,103.43) 135.33,106.96 DISP_CONN.2
DISP_REFRESH: DISP_CONN.4 MCU.32 | length 54.4
  Component Side Top w0.254: MCU.32 119.77,138.63 124.93,133.47 124.93,130.72 123.91,129.7 123.91,116.48 125.26,115.13 125.26,106.05 126.12,105.19 v5(126.25,105.19)
  Component Side Bottom w0.254: v5(126.25,105.19) 129.2,102.24 134.4,102.24 136.33,104.17 DISP_CONN.4
DISP_SCK: DISP_CONN.1 MCU.30 | length 51.5
  Component Side Top w0.254: MCU.30 118.77,138.71 124.22,133.26 124.22,131.47 123.2,130.45 123.2,115.77 124.31,114.66 124.31,105.51 126.86,102.96 130.1,102.96 v2(132.83,105.69)
  Component Side Bottom w0.254: v2(132.83,105.69) 134.83,107.69 DISP_CONN.1
DISP_SS: DISP_CONN.3 MCU.27 | length 56.5
  Component Side Top w0.254: MCU.27 117.27,136.65 121.89,132.03 121.89,114.26 122.76,113.39 122.76,104.24 125.69,101.31 131.49,101.31 v2(133.72,103.54)
  Component Side Bottom w0.254: v2(133.72,103.54) 135.83,105.65 DISP_CONN.3
DTR: MCU.3 XB24_BS.10 | length 48.5
  Component Side Top w0.254: v1(107.32,147.33) 107.67,146.98 MCU.3
  Component Side Bottom w0.254: v1(107.32,147.33) 108.3,148.31 110.6,148.31 112.3,150.01 114.54,150.01 115.78,151.25 117.12,151.25 119.15,149.22 146.1,149.22 v1(148.26,151.38)
GLED2_EN: MCU.60 R29.2 | length 8.2
  Component Side Top w0.254: R29.2 109.48,153.95 110.1,153.33 110.85,153.33 114.27,149.91 MCU.60
GLED_EN: MCU.51 R12.2 | length 4.7
  Component Side Top w0.254: MCU.51 118.77,150.27 119.09,150.59 R12.2
GND: "+ JST_BAT1.1" Back.2 BATT_HOLDER_BS.2 C2.2 C3.2 C4.1 C5.1 C6.1 C7.1 C8.1 C9.1 C10.2 C11.1 C12.1 C13.1 C14.1 C15.1 C16.1 C17.1 C18.2 C19.2 C20.1 C21.1 C22.1 C23.2 C24.1 C25.2 C26.1 C27.2 C28.2 C29.2 C30.2 C31.2 C32.2 C33.2 C34.1 C35.1 C36.1 DISP_CONN.9 DISP_CONN.10 DISP_MODE.1 Down.2 DS3231.5 DS3231.6 DS3231.7 DS3231.8 DS3231.9 DS3231.10 DS3231.11 DS3231.12 DS3231.13 FRAM.4 MCP73831.2 MCU.7 MCU.22 MCU.33 MCU.47 MCU.54 Menu/OK.2 micro_SD.6 micro_SD.9 NCH_1.1 NCH_1.3 NCH_2.1 NCH_2.3 R3.2 R11.1 R14.1 R23.1 R24.1 R25.2 R26.1 R27.1 R30.2 R40.1 REG710.2 RESET.2 RTC_RESET.1 SWDIO.3 SWDIO.5 SWDIO.9 TPS62742.3 TPS_SD.2 Up.2 uUSB.5 XB24_BS.1 XB24_BS.11 XB24_BS.13 XB24_BS.22 XB24_BS.35 | length 113.3
  Component Side Top w0.254: v1(104.09,150.02) 104.09,149.66 C10.2 ; v10(104.38,160.43) R30.2 ; RTC_RESET.1@105.19,112.03 105.19,110.73 v1(105.92,110) ; C33.2 105.55,136.64 v2(106.52,136.64) ; v2(108.11,156.28) NCH_2.1 ; TPS_SD.2 109.71,132.8 ; C31.2@110.42,133.51 C31.2 ; v2(110.65,156.35) NCH_2.3 ; v1(110.68,101.96) C13.1 ; C31.2@110.95,133.6 R40.1 ; v2(112.02,134.08) 112.67,134.08 113.23,133.52 C32.2 ; R23.1 v1(113.67,160.95) ; micro_SD.9 114.77,116.455 v2(114.77,115.27) ; v2(115.41,158.3) 115.41,157.26 NCH_1.1 ; C14.1 v1(116.81,114.65) ; NCH_1.3 118.02,157.27 v2(118.02,158.31) ; v1(118.23,104.54) DS3231.8 ; v9(122.87,160) R14.1 122.87,157.87 122.12,157.12 122.89,157.12 124.17,155.84 C34.1 ; v9@122.88,160.01 R11.1 ; FRAM.4 v2(126.41,125.86) ; uUSB.5@126.61,168.31 v1(126.66,168.26) ; v1(128.91,168.23) uUSB.5@128.91,168.31 ; v1(131.73,136.41) SWDIO.3 ; C11.1 v2(132.23,120.6) ; v1(133,136.42) SWDIO.5 ; v1(135.54,136.58) SWDIO.9 ; v2(138.24,157.66) v2@138.24,157.67 ; v6(138.78,111.71) REG710.2 ; TPS62742.3 141.98,157.84 ; XB24_BS.13 v1(142.25,151.49) ; v1(142.27,126.04) XB24_BS.22 ; v6(142.58,114.83) C9.1 143.12,113.52 R3.2 ; C12.1 143.64,107.78 v1(145.86,110) ; XB24_BS.11 v1(146.25,151.52) ; R24.1 151.98,158.17 151.98,159.81 152.28,160.11 MCP73831.2 ; C8.1 v1(155.47,162.52) ; v1(168.27,126.13) XB24_BS.35
  Component Side Top w0.5: 109.71,132.8 C31.2@110.42,133.51 ; DS3231.8 DS3231.7 DS3231.6 DS3231.5 ; DS3231.9 DS3231.10 DS3231.11 DS3231.12 DS3231.13 ; DS3231.13@129.01,109.38 C16.1 v2(131.2,108.49)
  Component Side Top w0.75: C31.2 C32.2@113.08,133.51 ; MCP73831.2 154.4,160.11 154.76,160.47 C8.1
  Component Side Top w1: v5(113.75,120.81) micro_SD.6 118.12,120.81 118.82,121.51 C3.2 ; v1(125.43,165.46) 126.13,165.46 ; v4(132.65,168.31) 134.02,166.94 C19.2 ; v1(138.26,152.05) C18.2 ; C26.1 166.25,155.34 XB24_BS.1
  Component Side Bottom w0.254: v1(101.23,140.64) R26.1 ; v1(101.3,136.27) R27.1 ; v1(105.92,110) Down.2 ; v7(121.43,110) Up.2 ; DISP_CONN.9@138.83,108.4 DISP_CONN.10@139.18,108.41 ; DISP_MODE.1 143.02,107.16 v1(145.86,110) Back.2 ; v2(165.53,109.95) 167.95,109.95 Menu/OK.2
  Component Side Bottom w0.5: C36.1 115.89,140.6
  Component Side Bottom w1: C4.1 C6.1@138.97,106.33 ; C6.1@139.18,105.9 DISP_CONN.10@139.18,108.41
  other v2: 156.45,111.5 107.73,151.45 166.59,153.28 166.4,155.05 165.16,162.31 165.16,163.36
  other v3: 114.28,142.41 117.78,142.47 114.26,145.98 117.79,145.98
  other v4: 139.71,102.04 139.6,105.37 122.9,168.34
  other v6: 136.04,111.86
  other v8: 142.23,157.09 142.23,158.09
MISO: MCU.23 micro_SD.7 | length 24
  Component Side Top w0.254: v5(114.62,129.16) 114.62,131.79 115.27,132.44 MCU.23 ; micro_SD.7 117.71,119.71 v2(118.07,119.35)
  Component Side Bottom w0.254: v5(114.62,129.16) 114.62,122.8 v2(118.07,119.35)
MOSI: MCU.25 micro_SD.3 | length 20.7
  Component Side Top w0.254: micro_SD.3 118.9,124.11 120.56,125.77 120.56,130.65 116.27,134.94 MCU.25
NetC1_1: C1.1 REG710.4 | length 2.1
  Component Side Top w0.254: C1.1 C1.1@139.73,117.13
  Component Side Top w0.5: REG710.4 C1.1@139.73,117.13
NetC1_2: C1.2 REG710.6 | length 1.9
  Component Side Top w0.5: REG710.6 C1.2@137.83,117.31
NetC23_1: C23.1 MCU.1 Y1.2 | length 5.3
  Component Side Top w0.254: Y1.2 110.44,147.98 ; Y1.2@109.01,149.42 109.01,149.81 109.67,150.47 C23.1 ; 110.45,147.98 MCU.1
NetC25_1: C25.1 MCU.2 Y1.1 | length 8.4
  Component Side Top w0.254: C25.1 105.74,150.18 Y1.1 108.44,147.48 MCU.2 ; Y1.1@106.51,149.79 Y1.1@106.51,150.11
NetC29_1: C29.1 C30.1 FB_1.2 MCU.8 | length 6.1
  Component Side Top w0.254: v2(110.09,144.76) 110.37,144.48 MCU.8
  Component Side Bottom w1: FB_1.2 v2(110.09,144.76) C29.1@112.56,144.76 ; C30.1 C29.1@112.81,144.45
NetC33_1: C33.1 TPS_SD.4 | length 1.8
  Component Side Top w0.254: C33.1@105.69,135.25 106.43,134.51 TPS_SD.4
NetD1_2: D1.2 R18.1 | length 1.9
  Component Side Bottom w0.254: D1.2 R18.1
NetDISP_CONN1_8: DISP_CONN.8 DISP_MODE.2 | length 10.4
  Component Side Bottom w0.254: DISP_CONN.8 138.33,109.4 138.67,109.74 141.33,109.74 142.32,108.75 DISP_MODE.2
NetDS3231_4: DS3231.4 RTC_RESET.2 | length 13.7
  Component Side Top w0.254: RTC_RESET.2@106.79,107.93 117.63,107.93 117.96,108.26 117.96,108.89 118.69,109.62 DS3231.4
NetDUAL_NCH_1_2: NCH_1.2 R10.1 R11.2 | length 9.2
  Component Side Top w0.254: NCH_1.2 116.71,159.92 117.83,161.04 R11.2 ; R10.1 NCH_1.2@117.02,156.92
NetDUAL_NCH_1_4: NCH_1.4 R12.1 R14.2 | length 4.6
  Component Side Top w0.254: R12.1 119.09,157.07 NCH_1.4 121.04,159.02 R14.2
NetDUAL_NCH_1_5: NCH_1.5 NCH_1.6 rgLED_1.2 | length 7.8
  Component Side Top w0.254: NCH_1.6@117.96,163.71 v2(117.96,164.84) ; NCH_1.6 NCH_1.5
  Component Side Bottom w0.254: rgLED_1.2 116.64,168.59 117.27,167.96 117.27,165.53 v2(117.96,164.84)
NetDUAL_NCH_1_7: NCH_1.7 NCH_1.8 rgLED_1.4 | length 3.6
  Component Side Top w0.254: NCH_1.8 NCH_1.7 ; v2@115.44,164.89 v2(115.52,164.97)
  Component Side Bottom w0.254: v2(115.52,164.97) rgLED_1.4
NetDUAL_NCH_2_2: NCH_2.2 R22.1 R25.1 | length 6.9
  Component Side Top w0.254: R22.1@106.09,157.32 R25.1@106.09,159.35 ; R25.1 108.43,159.44 109.38,158.49 NCH_2.2
NetDUAL_NCH_2_4: NCH_2.4 R29.1 R30.1 | length 11.6
  Component Side Top w0.254: R30.1 109.71,161.51 111.92,159.3 NCH_2.4 111.92,155.24 R29.1
NetDUAL_NCH_2_5: NCH_2.5 NCH_2.6 rgLED_2.2 | length 5.3
  Component Side Top w0.254: v2(111.19,164.89) 111.19,164.17 NCH_2.6 NCH_2.5
  Component Side Bottom w0.254: v2(111.19,164.89) 111.19,166.7 rgLED_2.2
NetDUAL_NCH_2_7: NCH_2.7 NCH_2.8 rgLED_2.4 | length 8
  Component Side Top w0.254: NCH_2.8 NCH_2.7 109.38,164.95 v2(109.44,165.01)
  Component Side Bottom w0.254: v2(109.44,165.01) 109.44,167.77 110.25,168.58 rgLED_2.4@111.69,168.58
NetFRAM1_1: FRAM.1 R8.1 | length 2
  Component Side Top w0.254: FRAM.1@130.23,124.69 R8.1
NetL2_1: L2.1 TPS62742.2
NetMCP73831_1: MCP73831.1 R18.2 | length 21.9
  Component Side Top w0.254: MCP73831.1 155.11,159.16 v1(156.86,160.91)
  Component Side Bottom w0.254: R18.2@142.95,167.45 144.95,165.45 153.92,165.45 156.86,162.51 v1(156.86,160.91)
NetMCP73831_5: MCP73831.5 R24.2 | length 2.1
  Component Side Top w0.254: MCP73831.5 150.47,157.88 R24.2
Netmicro_SD_1: micro_SD.1 R4.2 | length 3.2
  Component Side Top w0.254: micro_SD.1 117.94,126.31 R4.2
Netmicro_SD_8: micro_SD.8 R2.2 | length 6.7
  Component Side Top w0.254: R2.2 112.72,116.83 114.5,118.61 micro_SD.8
NetPWR_GOOD_MCU_RESET_1: PWR_G_RESET.1 R28.1 TPS62742.7 | length 17.6
  Component Side Top w0.254: PWR_G_RESET.1 v1(132.34,154.58) ; TPS62742.7 v1@145.28,156.34
  Component Side Bottom w0.254: v1(132.34,154.58) 132.34,155.04 133.03,155.73 144.7,155.73 v1(145.28,156.31)
NetR5_1: R5.1 rgLED_1.1 | length 1.5
  Component Side Top w0.254: R5.1 120.15,168.48 v2(120.16,168.49)
  Component Side Bottom w0.254: v2@120.06,168.59 v2(120.16,168.49)
NetR7_1: R7.1 rgLED_1.3 | length 2.7
  Component Side Top w0.254: R7.1 119.67,166.68 v2(120.17,167.18)
  Component Side Bottom w0.254: rgLED_1.3@119.03,167.18 v2(120.17,167.18)
NetR16_1: R16.1 rgLED_2.1 | length 4.6
  Component Side Top w0.254: v2(106.35,167.16) 106.82,166.69 R16.1
  Component Side Bottom w0.254: v2(106.35,167.16) 106.37,167.18 rgLED_2.1@108.19,167.18
NetR17_1: R17.1 rgLED_2.3 | length 3.7
  Component Side Top w0.254: v2(106.45,168.59) R17.1
  Component Side Bottom w0.254: v2(106.45,168.59) 107.68,168.59 rgLED_2.3@107.69,168.58
NetR31_1: R31.1 R32.2 uUSB.4 | length 10.2
  Component Side Top w0.254: v1(126.66,162.41) 127.11,162.86 uUSB.4 ; v1(129.95,161.74) R32.2 R31.1
  Component Side Bottom w0.254: v1(126.66,162.41) 127.33,161.74 v1(129.95,161.74)
NetR36_1: R36.1 R39.2 RESET.1 | length 4.5
  Component Side Top w0.254: R39.2 124.1,151.74 125.99,153.63 RESET.1@125.99,155.29
NetR38_1: R38.1 TPS_SD.5 | length 5.3
  Component Side Top w0.254: R38.1 102.58,133.06 103.23,133.71 105.01,133.71 105.92,132.8 TPS_SD.5
R\E\S\E\T\: C34.2 MCU.52 PWR_G_RESET.2 R39.1 SWDIO.10 | length 34.8
  Component Side Top w0.254: v2(118.08,151.74) 118.27,151.55 MCU.52 ; v2(120.9,151.74) R39.1 ; R39.1@122.67,152.23 C34.2 ; PWR_G_RESET.2 132.36,152.19 v1(134.1,152.19) 134.1,145.51 135.54,144.07 SWDIO.10
  Component Side Bottom w0.254: v2(118.08,151.74) v2(120.9,151.74) 122.94,151.74 123.41,152.21 123.43,152.19 v1(134.1,152.19)
RADIO_EN: MCU.59 R23.2 TPS62742.4 | length 41.3
  Component Side Top w0.254: R23.2 113.67,157.07 112.46,155.86 112.46,153.32 v1(112.61,153.17) 112.61,152.34 114.77,150.18 MCU.59 ; v3(139.55,157.34) TPS62742.4
  Component Side Bottom w0.254: v1(112.61,153.17) 114.09,153.17 115.42,154.5 130.21,154.5 132.1,156.39 138.6,156.39 v3(139.55,157.34)
RADIO_R\E\S\E\T\: MCU.6 R37.2 XB24_BS.6 | length 67.8
  Component Side Top w0.254: v1(104.16,146.19) 104.861,145.489 111.42,145.489 MCU.6 ; XB24_BS.6@156.21,149.955 R37.2
  Component Side Bottom w0.254: v1(104.16,146.19) 104.16,147.01 107.11,149.96 109.65,149.96 111.53,151.84 113.91,151.84 115.84,153.77 154.64,153.77 156.16,152.25 v1(156.16,151.39)
RLED2_EN: MCU.61 R22.2 | length 12
  Component Side Top w0.254: R22.2@106.09,155.52 106.09,153.76 107.05,152.8 110.68,152.8 113.77,149.71 MCU.61
RLED_EN: MCU.53 R10.2 | length 4.9
  Component Side Top w0.254: R10.2 117.02,151.52 117.77,150.77 MCU.53
RTS: MCU.39 XB24_BS.29 | length 45.3
  Component Side Top w0.254: MCU.39 123.58,143.48 125.75,141.31 v3(125.75,140.04)
  Component Side Bottom w0.254: v3(125.75,140.04) 125.75,138.55 139.24,125.06 155.31,125.06 v1(156.3,126.05)
RX_STRENGTH: MCU.5 XB24_BS.7 | length 58.3
  Component Side Top w0.254: v1(105.75,146.22) 105.93,146.22 106.17,145.98 MCU.5
  Component Side Bottom w0.254: v1(105.75,146.22) 105.75,147.44 107.4,149.09 110.13,149.09 111.86,150.82 114.28,150.82 116.39,152.93 152.69,152.93 v1(154.17,151.45)
RXD: MCU.20 XB24_BS.3 | length 64.1
  Component Side Top w0.254: MCU.20 113.77,136.03 v1(113.9,136.03)
  Component Side Bottom w0.254: v1(113.9,136.03) 119.34,136.03 123.13,139.82 123.13,144.8 124.63,146.3 161.73,146.3 162.25,146.82 v1(162.25,151.41)
SCK: MCU.24 micro_SD.5 | length 20.4
  Component Side Top w0.254: MCU.24 115.77,133.99 117.18,132.58 v2(117.18,132.49) ; micro_SD.5 v3(117.63,121.91)
  Component Side Bottom w0.254: v2(117.18,132.49) 117.18,124.58 118.23,123.53 118.23,122.51 v3(117.63,121.91)
SCL: DS3231.16 FRAM.6 MCU.44 R34.2 | length 42.2
  Component Side Top w0.254: MCU.44 125.96,145.98 127.57,144.37 127.57,130.43 125.4,128.26 125.4,122.81 127.68,120.53 FRAM.6 127.68,114.52 DS3231.16 ; 127.7,115.79 R34.2
SD_CD: MCU.18 micro_SD.10 R1.2 | length 28
  Component Side Top w0.254: R1.2@107.29,114.34 micro_SD.10@107.29,116.575 ; micro_SD.10@107.34,116.625 v5(107.34,118.41) ; v5(111.51,138.53) 112.3,138.53 112.77,139 MCU.18
  Component Side Bottom w0.254: v5(107.34,118.41) 107.34,134.36 v5(111.51,138.53)
SD_EN: MCU.17 R40.2 TPS_SD.3 | length 7.8
  Component Side Top w0.254: TPS_SD.3 109.13,137.56 111.2,139.63 MCU.17
SD_SS: MCU.26 micro_SD.2 | length 18.6
  Component Side Top w0.254: micro_SD.2@116.35,125.33 v2(118.46,125.33) ; MCU.26 116.77,135.71 v2(120.27,132.21)
  Component Side Bottom w0.254: v2(118.46,125.33) 120.27,127.14 v2(120.27,132.21)
SDA: DS3231.15 FRAM.5 MCU.43 R35.2 | length 45
  Component Side Top w0.254: MCU.43 125.57,145.48 126.87,144.18 126.87,130.8 124.66,128.59 124.66,122.25 126.41,120.5 FRAM.5 126.41,113.27 127.52,112.16 DS3231.15 130.58,112.16 R35.2
SLEEP_STATUS: MCU.42 XB24_BS.26 | length 39.9
  Component Side Top w0.254: MCU.42 125.101,144.98 125.44,144.641 v3(125.44,144.57)
  Component Side Bottom w0.254: v3@125.44,144.62 v3(125.44,144.57) 135.92,144.57 150.24,130.25 v1(150.24,126.18)
SWDCLK: MCU.57 R33.1 SWDIO.4 | length 43.3
  Component Side Top w0.254: v1(114.17,156.02) 114.17,152.83 114.16,152.82 115.77,151.21 MCU.57 ; R33.1@129.21,147.87 v3(129.21,156.23) ; R33.1 129.26,146.33 129.56,146.03 129.56,140.01 129.91,139.66 131.36,139.66 131.73,140.03 SWDIO.4
  Component Side Bottom w0.254: v1(114.17,156.02) 129,156.02 v3(129.21,156.23)
SWDIO: MCU.58 SWDIO.2 | length 55.9
  Component Side Top w0.254: v1(113.29,155.16) 113.48,154.97 113.48,152.59 115.27,150.8 MCU.58 ; SWDIO.2 130.46,144.04 132.83,146.41 132.83,148.84 130.92,150.75 v3(130.92,156.73)
  Component Side Bottom w0.254: v1(113.29,155.16) 113.29,156.64 113.91,157.26 126.95,157.26 131.13,161.44 131.13,162.37 131.75,162.99 132.85,162.99 133.69,162.15 133.69,159.5 v3(130.92,156.73)
TXD: MCU.19 XB24_BS.4 | length 64.6
  Component Side Top w0.254: v1(112.5,137.53) 113.27,138.3 MCU.19 ; v7(159.08,144.38) 160.25,145.55 XB24_BS.4
  Component Side Bottom w0.254: v1(112.5,137.53) 112.5,136.02 113.64,134.88 119.36,134.88 124.21,139.73 124.21,144.62 124.97,145.38 152.47,145.38 153.47,144.38 v7(159.08,144.38)
USB_HOST_EN: MCU.50 R32.1 | length 19.5
  Component Side Top w0.254: MCU.50 119.27,149.64 120.03,150.4 v1(120.82,150.4) ; R32.1 129.95,151.43 v1(129.99,151.39)
  Component Side Bottom w0.254: v1(120.82,150.4) 123.49,150.4 124.48,151.39 v1(129.99,151.39)
V_DISP: C4.2 C5.2 C6.2 C7.2 DISP_CONN.5 DISP_CONN.6 DISP_CONN.7 DISP_MODE.3 REG710.1 | length 18.5
  Component Side Top w0.5: v6@137.44,110.36 C7.2 137.44,112.31 REG710.1
  Component Side Bottom w0.254: DISP_CONN.5 137.22,108.4 DISP_CONN.6 137.33,108.36 137.68,108.36 DISP_CONN.7@137.83,108.51 ; C4.2 137.47,101.98 138.54,100.91 140.54,100.91 141.62,101.99 DISP_MODE.3
  Component Side Bottom w0.5: DISP_CONN.6@137.22,108.4 v6(137.22,110.14)
  Component Side Bottom w1: C6.2@137.33,106.55 DISP_CONN.6@137.33,108.36 ; C4.2 C6.2@137.47,106.41
VBAT: C8.2 D3.1 MCP73831.3 R19.2 SW_PWR.2 | length 76.9
  Component Side Top w1: D3.1 v1(149.81,163.65) 153.25,163.65 ; MCP73831.3@153.29,161.34 SW_PWR.2
  Component Side Bottom w0.5: R19.2@102.315,142.785 101.855,142.785 102.01,142.94 102.01,159.86 105.8,163.65 v1(149.81,163.65)
VBAT_LEVEL: MCU.11 R19.1 R26.2 | length 9.6
  Component Side Top w0.254: v1(105.31,142.58) 105.71,142.98 MCU.11
  Component Side Bottom w0.254: R26.2 R19.1 v1(105.31,142.58)
VBAT_RAW: "+ JST_BAT1.2" SW_PWR.1 | length 8.7
  Component Side Top w1: SW_PWR.1 156.29,165.02 157.76,163.55 162.23,163.55 163.17,164.49
VBUS: C19.1 D2.1 R20.2 uUSB.1 | length 61.4
  Component Side Top w0.254: v1(132.24,162.15) 132.24,163.65
  Component Side Top w1: 129.375,165.215 130.94,163.65 132.24,163.65 D2.1
  Component Side Bottom w0.254: R20.2 102.12,138.75 102.87,139.5 105.13,139.5 106.37,140.74 106.37,143.16 105.65,143.88 104.59,143.88 103.18,145.29 103.18,147.11 106.34,150.27 106.34,151.61 108.89,154.16 113.86,154.16 114.96,155.26 129.39,155.26 130.06,155.93 130.06,158.47 132.24,160.65 v1(132.24,162.15)
VBUS_DETECT: MCU.12 R20.1 R27.2 | length 11.2
  Component Side Top w0.254: v1(108.32,141.46) 109.34,142.48 MCU.12
  Component Side Bottom w0.254: R27.2@103.92,136.28 R20.1 105.15,138.29 v1(108.32,141.46)
VCC: C9.2 C15.2 D1.1 D2.2 D3.2 MCP73831.4 REG710.5 TPS62742.1 TPS62742.8 TPS62742.9 TPS62742.10 TPS62742.11 TPS62742.12 | length 101
  Component Side Top w0.254: v1(136.45,167.39) 140.19,163.65 D2.2
  Component Side Top w0.5: REG710.5 138.78,114.67 139.22,114.23 141.01,114.23 C9.2
  Component Side Top w1: C9.2 141.18,115.25 142.04,116.11 v2(144.69,116.11) ; D3.2 146.39,161.06 v2(148.95,161.06) MCP73831.4
  Component Side Top w1.8: D2.2 D3.2
  Component Side Top w2: 142.21,160.29 142.21,163.62
  Component Side Bottom w0.254: v1(136.45,167.39) 136.66,167.6 D1.1
  Component Side Bottom w1: v2(144.69,116.11) 158.99,116.11 164.58,121.7 164.58,151.06 154.58,161.06 v2(148.95,161.06)
VDD_RTC_BACKUP: BATT_HOLDER_BS.1 C16.2 DS3231.14 | length 32.3
  Component Side Top w0.5: DS3231.14 132.16,110.89 133.06,109.99 133.06,107.75 137.5,103.31 155.8,103.31 BATT_HOLDER_BS.1@156.38,103.89
VDD_SD: C2.1 C3.1 micro_SD.4 R1.1 R2.1 R4.1 R38.2 TPS_SD.6 | length 43.8
  Component Side Top w0.254: R38.2 104.78,131.85 TPS_SD.6 ; 110.66,123.88 114.67,127.89 117.18,127.89 118.43,129.14 R4.1 ; R2.1 R1.1 109.08,120.66 111.43,123.01
  Component Side Top w1: TPS_SD.6@106.43,131.62 106.43,128.01 111.43,123.01 micro_SD.4 116.232,123.012 120.408,123.012 C3.1
WAKE_ALARM: DS3231.3 MCU.35 R21.1 | length 37.7
  Component Side Top w0.254: R21.1 116.94,109.09 118.74,110.89 DS3231.3 120.38,110.89 121.53,112.04 v2(121.53,112.93) ; MCU.35 122.18,141.48 122.79,140.87 v3(122.79,136.89)
  Component Side Bottom w0.254: v2@121.49,112.93 121.49,134.447 122.8,135.757 v3@122.8,136.89
pads on no net: "+ JST_BAT1.3" DS3231.1 FRAM.2 FRAM.3 FRAM.7 MCU.9 MCU.10 MCU.13 MCU.14 MCU.15 MCU.16 MCU.31 MCU.49 MCU.62 MCU.63 MCU.64 micro_SD.12 SW_PWR.3 SW_PWR.4 SW_PWR.5 SWDIO.6 SWDIO.7 SWDIO.8 XB24_BS.5 XB24_BS.8 XB24_BS.9 XB24_BS.12 XB24_BS.14 XB24_BS.15 XB24_BS.16 XB24_BS.17 XB24_BS.18 XB24_BS.19 XB24_BS.20 XB24_BS.21 XB24_BS.23 XB24_BS.24 XB24_BS.27 XB24_BS.28 XB24_BS.30 XB24_BS.31 XB24_BS.32 XB24_BS.33 XB24_BS.34 XB24_BS.36 XB24_BS.37
copper on no net:
  other v2: 150.04,168.68 158.12,168.73
  other v4: 160.36,166.76 167.98,166.76

## Polygon pours and split planes (outlines as drawn)
GND on Component Side Top "MCU_GND" (solid, remove dead copper, pour order 12): 111.79,140.88 111.79,147.38 112.96,148.55 119.37,148.55 120.28,147.64 120.28,140.398 119.784,139.86 112.81,139.86
+3V3_RADIO on Component Side Top "+3v3_radio" (solid, remove dead copper, pour order 10): 140.53,156.35 140.53,155.35 141.125,154.755 143.84,154.925 142.265,154.925 141.54,155.65 141.54,156.33 141.51,156.36
GND on Component Side Top "reg_gnd" (solid, remove dead copper, pour order 6): 138.83,157.44 138.83,156.82 138.71,156.64 137.77,156.64 137.64,156.77 137.64,158.53 137.74,158.63 138.71,158.63 139.75,158.63 140.54,157.96 140.76,157.96 140.76,157.72 139.84,157.72 139.17,157.67
NetL2_1 on Component Side Top "+3v3_REG_Inductor" (solid, remove dead copper, pour order 0): 141.28,158.43 140.58,158.43 139.97,159.04 137.558,159.04 136.755,159.51 134.135,159.51 133.478,158.852 133.478,158.555 133.602,158.43 135.675,158.43 137.29,158.43 137.6,158.74 139.787,158.74 140.318,158.23 141.3,158.23
+3V3 on Component Side Top "Reg_L2" (solid, remove dead copper, pour order 4): 140.65,156.95 140.65,156.72 140.018,156.382 138.7,155.24 138.7,154.26 134.15,154.26 133.49,154.92 133.49,156.72 133.612,156.83 137.31,156.83 137.67,156.5 138.87,156.5 140.32,156.95
VCC on Component Side Top "reg_Vcc" (solid, remove dead copper, pour order 8): 140.16,159.19 138.3,159.19 138.3,159.96 138.7,160.36 143.72,160.36 144.05,160.03 144.05,158.99 143.73,158.73 143.73,156.78 143.22,156.78 143.22,158.56 142.675,159.105 141.565,159.105 141.19,158.73 140.62,158.73
GND on Component Side Bottom "MCU_GND" (solid, remove dead copper, pour order 14): 112.055,140.765 112.055,142.375 112.055,145.47 111.79,145.735 111.79,147.38 112.96,148.55 118.23,148.55 120.28,146.5 120.28,142.43 117.91,139.86 112.96,139.86
GND on Ground Plane (split plane): 166.168,157.783 170.868,157.783 174.398,154.253 174.398,146.373 173.598,145.573 169.008,145.573 169.008,145.593 166.168,145.593 166.168,138.023 166.188,131.853 169.428,131.853 169.428,120.593 166.198,120.593 166.198,100.51 100.51,100.51 100.51,169.49 166.168,169.49
+3V3 on Power Plane (split plane): 166.159,157.774 170.859,157.774 174.389,154.244 174.389,146.364 173.589,145.564 168.999,145.564 168.999,145.584 166.159,145.584 166.159,138.014 166.179,131.844 169.419,131.844 169.419,120.584 166.189,120.584 166.189,100.51 100.51,100.51 100.51,169.49 166.159,169.49

## Other copper
Ground Plane (plane layer: these items are gaps in the copper):
  pour cut-out: 166.198,99.61 166.198,120.593 169.428,120.593 169.428,131.853 166.188,131.853 166.168,138.023 166.168,145.593 169.008,145.593 169.008,145.573 173.598,145.573 174.398,146.373 174.398,154.253 170.868,157.783 166.168,157.783 166.168,170.28 176.168,170.28 176.168,99.61
Power Plane (plane layer: these items are gaps in the copper):
  pour cut-out: 166.189,99.75 166.189,120.584 169.419,120.584 169.419,131.844 166.179,131.844 166.159,138.014 166.159,145.584 168.999,145.584 168.999,145.564 173.589,145.564 174.389,146.364 174.389,154.244 170.859,157.774 166.159,157.774 166.159,170.53 176.159,170.53 176.159,99.75

## Silkscreen, mask and mechanical layers (free items; w line width, h text height)
Top Overlay:
  text "1" at 130.735,135.028 h0.9 r90
Bottom Overlay:
  lines w0.254: 132.14,122.883 132.14,113.883 142.14,113.883 142.14,122.808 ; 106.14,122.883 106.14,165.683 168.94,165.683 168.94,122.883 106.14,122.883
  text "BACON V2 Base Station." at 174,120 h1
  text "Victoria University & BRANZ 2017" at 174,118 h1

## Text inside footprints (layer, text, board x,y; h text height)
DISP_MODE: Bottom Overlay "GND" at 143.67,103.25 h1 r270; Bottom Overlay "+" at 141.07,104.15 h1 r90
micro_SD: Top Overlay "uSD" at 113.095,121.56 h1.52 r90
RESET: Top Overlay "SW" at 124.995,156.67 h1 r180
RTC_RESET: Top Overlay "SW" at 106.34,109.155 h1 r90
SWDIO: Mechanical 1 "J1" at 132.565,139.216 h0.64